# Altium PCB PCB1.PcbDoc
Units mil, origin at the board's own origin, x right, y up, seen from the top; angles counter-clockwise.
Board outline 3094 x 2704 mil, 2 copper layers (Top Layer, Bottom Layer); 41 components, 23 nets, 97 pads, 3 vias.
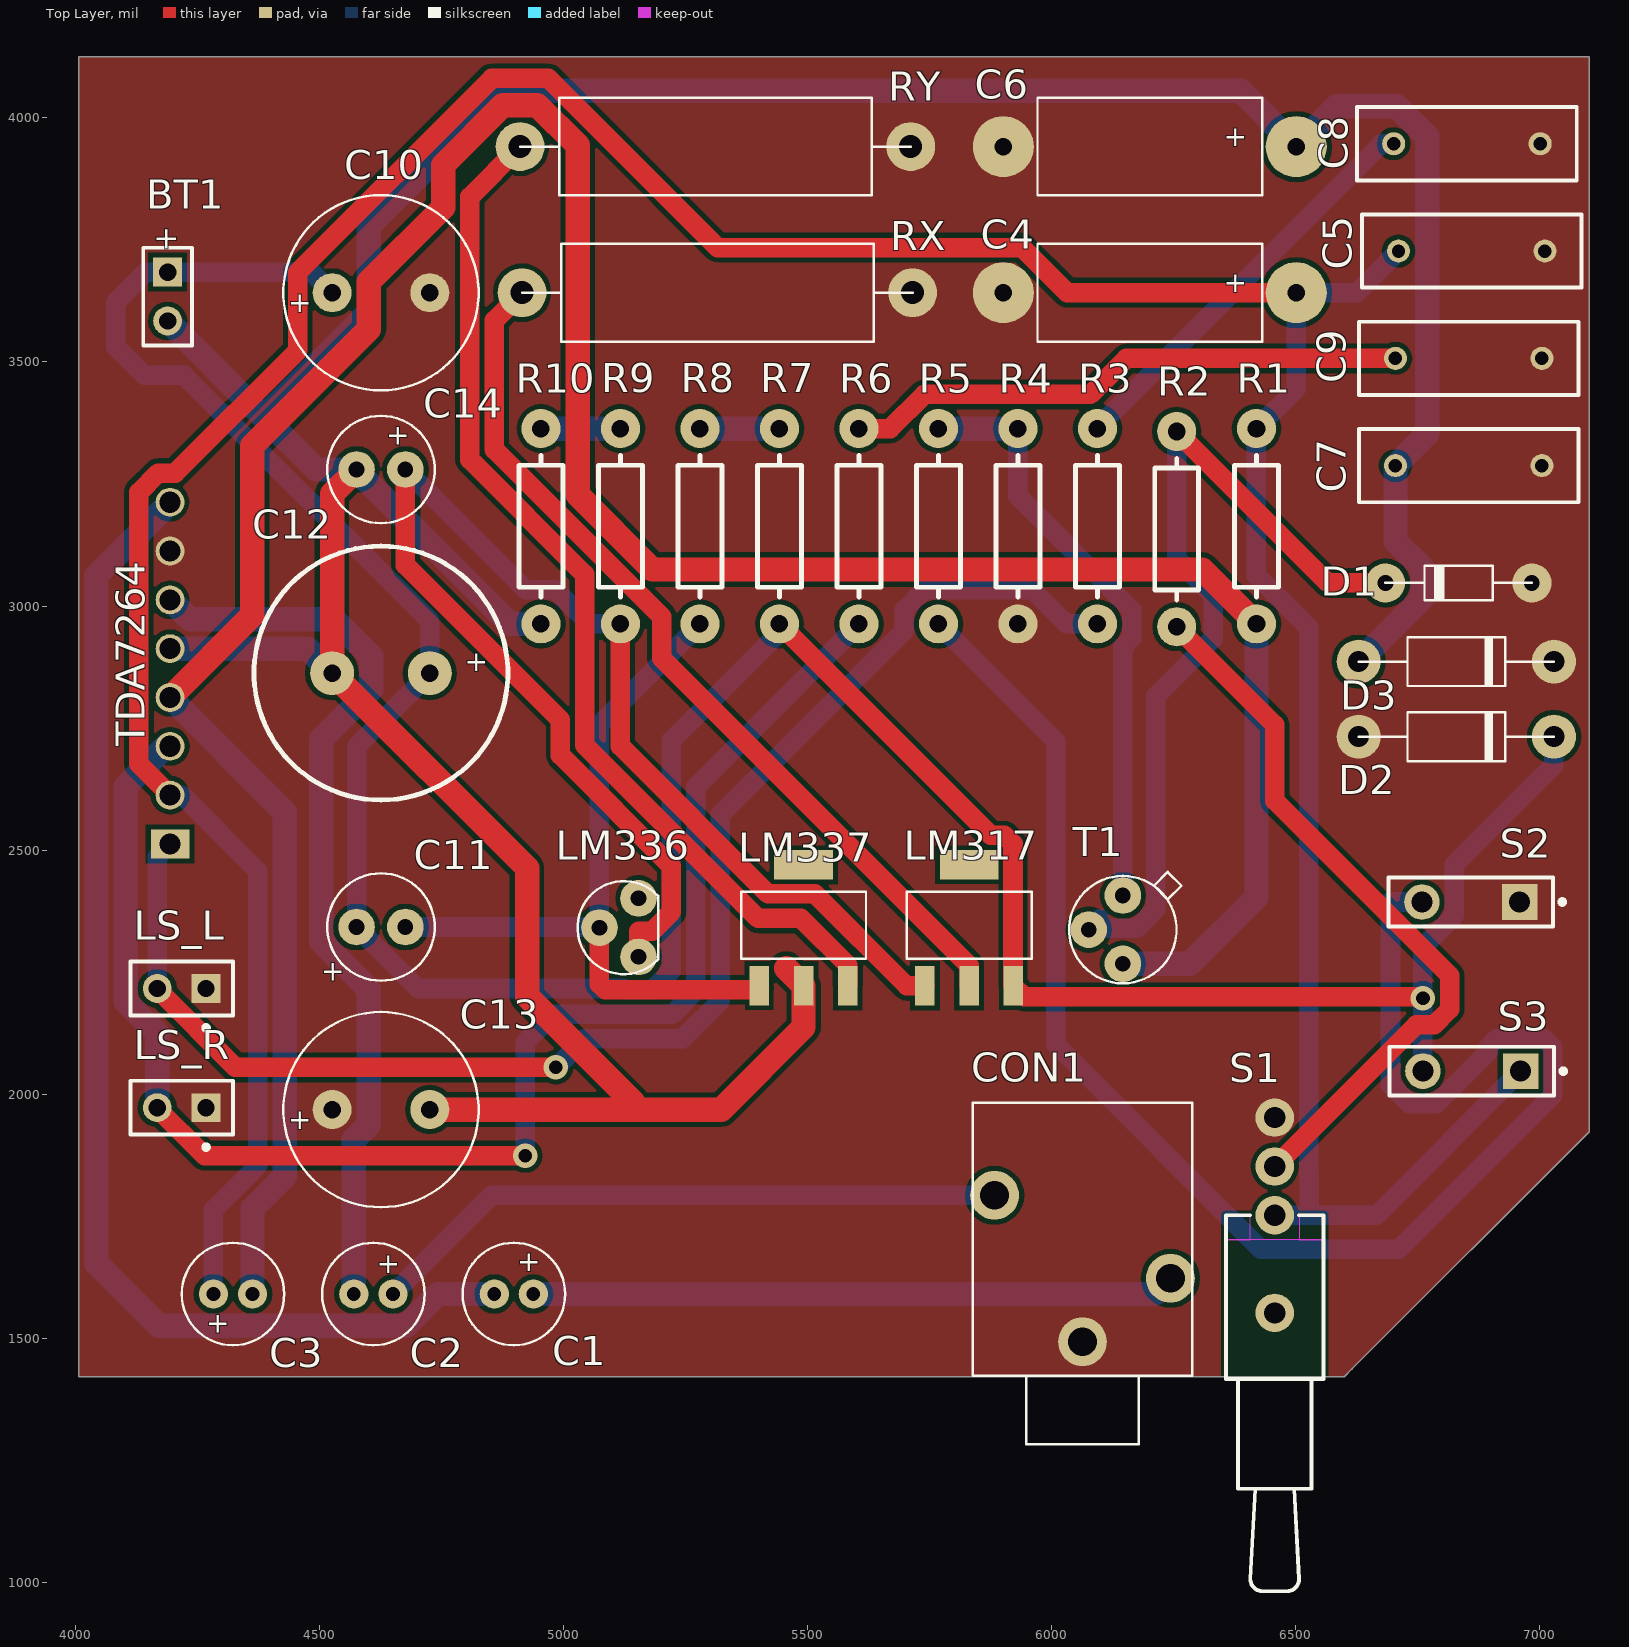
[diagram p0: Top Layer view]
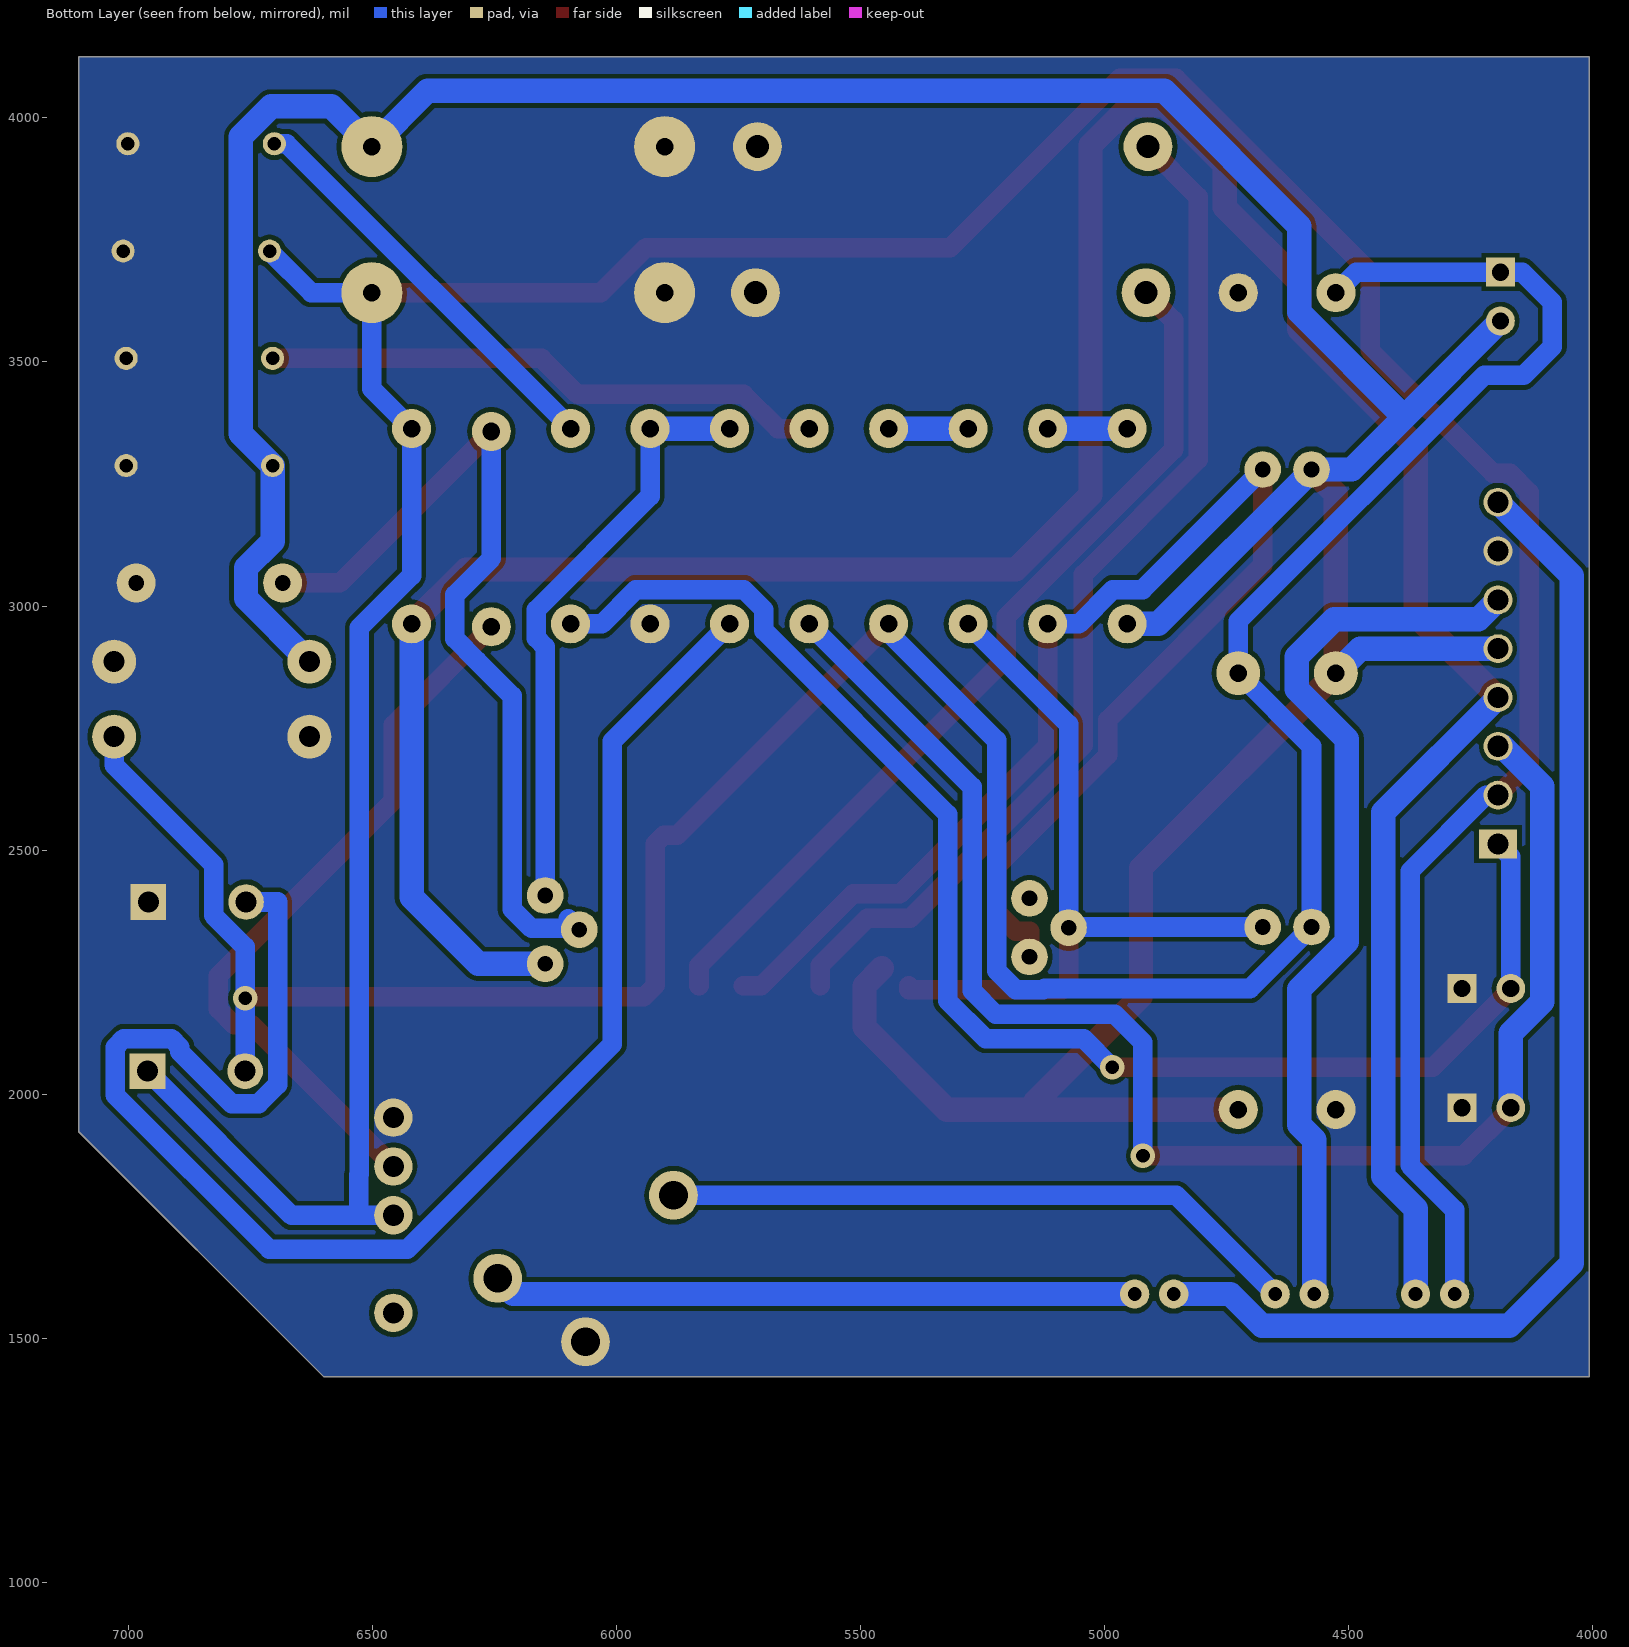
[diagram p1: Bottom Layer view, seen from below]

## Layer stack, top to bottom
Top Solder: solder mask 0.4, Solder Resist, Dk 3.5
Top Layer: signal copper 1.4
Dielectric1: dielectric 12.6, FR-4, Dk 4.8
Bottom Layer: signal copper 1.4
Bottom Solder: solder mask 0.4, Solder Resist, Dk 3.5

## Board outline
4007,4125 7101,4125 7101,1923 6615,1437 6599,1421 4007,1421

## Design rules (kind name [scope] priority, off if disabled: settings)
Clearance [All] p1: gap=10
PolygonConnect PolygonConnect_1 [All] p1: connectstyle=Direct reliefconductorwidth=10 reliefentries=4 polygonreliefangle="90 Angle" airgapwidth=10
PolygonConnect [All] p2: connectstyle=Relief reliefconductorwidth=10 reliefentries=4 polygonreliefangle="90 Angle" airgapwidth=10
RoomDefinition Sheet1 [InComponentClass('Sheet1')] p1: confinementstyle=ConfineOut formatcopy=TRUE lockcomponents=FALSE outline 7716.54,2649.61 7740.16,2649.61 8000,2389.76 7937.01,2326.77 7633.86,2326.77
RoutingVias [All] p1: holewidth=28 width=50 viastyle="Through Hole" minholewidth=28 minwidth=50 maxholewidth=28 maxwidth=50
SolderMaskExpansion [All] p1: expansion=4
UnpouredPolygon [All] p1: allowunpoured=FALSE
Width [All] p1: maxlimit=80 minlimit=40 preferedwidth=50
29 further rules are at their usual default settings.

## Components (designator, comment, footprint, x,y, rotation, side; value= is the part's Value field where it differs from the comment)
BT1 "Battery" BAT-2 4188.98,3633.86 r270 top
C1 "1uF" "cap 83 pol (D.21/.08/60/28)" 4898.17,1590.72 r180 top
C2 "1uF" "cap 83 pol (D.21/.08/60/28)" 4610.5,1590.72 r180 top
C3 "1uF" "cap 83 pol (D.21/.08/60/28)" 4322.83,1590.72 r0 top
C4 "Cap" "cap 48 pol (.46/.2/.6/125/36)" 6200.79,3641.73 r180 top
C5 "100nF" RAD-0.3 6860.24,3727.1 r180 top
C6 "Cap" "cap 48 pol (.46/.2/.6/125/36)" 6200.79,3940.94 r180 top
C7 "Cap" RAD-0.3 6854.02,3287.61 r180 top
C8 "Cap" RAD-0.3 6850.39,3946.85 r180 top
C9 "Cap" RAD-0.3 6854.02,3507.35 r180 top
C10 "CECR1000uF/25V" "cap 64 pol (D.4/.2/80/36)" 4625.98,3641.73 r0 top
C11 "CECR22uF/35V" "cap 62 pol (D.22/.1/75/32)" 4625.98,2342.52 r0 top
C12 "CECR470uF/63V" "cap 63 pol (D.52/.2/90/36)" 4625.98,2862.62 r180 top
C13 "CECR1000uF/25V" "cap 64 pol (D.4/.2/80/36)" 4625.98,1968.5 r0 top
C14 "CECR22uF/35V" "cap 62 pol (D.22/.1/75/32)" 4625.98,3279.53 r180 top
CON1 "CON JACKSOCK3.5/MJ-352W-0" "con jacksock 3.5mm (MJ-352W-0)" 6062.99,1692.91 r270 top
D1 "BZX79C5V1" DO-35 6783.46,3047.24 r180 top
D2 "1N4002" DO-41 6828.68,2732.28 r0 top
D3 "1N4002" DO-41 6828.68,2886.14 r0 top
LM317 "LM1117MPX-3.3" "smd SOT-223" 5830.59,2346.22 r0 top
LM336 "LM78L05ACZ" TO-92 5153.54,2341.22 r0 top
LM337 "LM1117MPX-3.3" "smd SOT-223" 5491.51,2346.22 r0 top
LS_L "Speaker" PIN2 4267.72,2216.54 r180 top
LS_R "Speaker" PIN2 4267.72,1972.44 r180 top
R1 "Res" "ws 0.6W H" 6419.29,3163.39 r90 top
R2 "Res" "ws 0.6W H" 6255.91,3157.48 r270 top
R3 "Res" "ws 0.6W H" 6093.59,3163.39 r90 top
R4 "Res" "ws 0.6W H" 5930.74,3163.39 r90 top
R5 "Res" "ws 0.6W H" 5767.89,3163.39 r90 top
R6 "Res" "ws 0.6W H" 5605.04,3163.39 r270 top
R7 "2K2" "ws 0.6W H" 5442.19,3163.39 r90 top
R8 "120R" "ws 0.6W H" 5279.34,3163.39 r90 top
R9 "2K2" "ws 0.6W H" 5116.49,3163.39 r90 top
R10 "120R" "ws 0.6W H" 4953.64,3163.39 r90 top
RX "1R1/2.5W" "ws 2.5W H" 5314.96,3641.73 r180 top
RY "1R1/2.5W" "ws 2.5W H" 5311.02,3940.94 r0 top
S1 "SW-SPDT" TL36WW15050 6456.69,1751.97 r270 top
S2 "SW-PB" SPST-2 6858.27,2393.7 r180 top
S3 "SW-SPST" SPST-2 6860.24,2047.24 r180 top
T1 "BC107" TO-18 6145.67,2337.08 r0 top
TDA7264 "TDA7264 stereo audio amplifier" MultiWatt8 4194,2512.62 r90 top

## Footprints (in the part's own frame and the unit in brackets; to place one, negate y for a bottom-side part, rotate by r counter-clockwise, add the part's x,y. Pads: shape width x height; smd on the part's side, far side on the other; paste and mask are expansions set on the pad)
BAT-2 [mm] "Battery; 2 Leads"
  rect 1.5x1.5 hole 0.9: 1(-1.27,0)
  round 1.5 hole 0.9: 2(1.27,0)
  silkscreen extent -2.54,-1.27 2.54,1.27
"cap 48 pol (.46/.2/.6/125/36)" [mil]
  round 125 / inner round 60 / far side round 125 hole 36 paste+0 mask+0: 1(-300,0) 2(300,0)
  silkscreen extent -230,-100 230,100
"cap 62 pol (D.22/.1/75/32)" [mil]
  round 75 / inner round 60 / far side round 75 hole 32 paste+0 mask+0: 1(-50,0) 2(50,0)
  silkscreen extent -110,-110 110,110
"cap 63 pol (D.52/.2/90/36)" [mil]
  round 90 / inner round 60 / far side round 90 hole 36 paste+0 mask+0: 1(-100,0) 2(100,0)
  silkscreen extent -260,-260 260,260
"cap 64 pol (D.4/.2/80/36)" [mil]
  round 80 / inner round 60 / far side round 80 hole 36 paste+0 mask+0: 1(-100,0) 2(100,0)
  silkscreen extent -200,-200 200,200
"cap 83 pol (D.21/.08/60/28)" [mil]
  round 60 hole 28 paste+0 mask+0: 1(-40,0) 2(40,0)
  silkscreen extent -105,-105 105,105
"con jacksock 3.5mm (MJ-352W-0)" [mil]
  round 100 / inner round 60 / far side round 100 hole 59 paste+0 mask+0: 1(200,0) 2(70,180) 3(-100,-180)
  silkscreen extent -290,-225 410,225
DO-35 [mil]
  round 80 / inner round 60 / far side round 80 hole 32 paste+0 mask+0: 1(-200,0) 2(100,0)
  silkscreen extent -200,-35 100,35
DO-41 [mil]
  round 90 / inner round 60 / far side round 90 hole 43 paste+0 mask+0: 1(-200,0) 2(200,0)
  silkscreen extent -200,-50 200,50
MultiWatt8 [mm]
  rect 1.5x2 hole 1.1: 1(0,0)
  round 1.5 hole 1.1: 2(2.54,0) 3(5.08,0) 4(7.62,0) 5(10.16,0) 6(12.7,0) 7(15.24,0) 8(17.78,0)
PIN2 [mm] "Photosensitive Diode; 2 Leads"
  rect 1.5x1.5 hole 0.9: 1(0,0)
  round 1.5 hole 0.9: 2(2.54,0)
  silkscreen extent -1.4,-1.4 3.94,2.17
RAD-0.3 [mm] "Radial Cap, Thru-Hole; 2 Leads; 0.3 in Pin Spacing"
  round 1.2 hole 0.7: 1(-3.81,0) 2(3.81,0)
  silkscreen extent -5.71,-1.91 5.71,1.91
"smd SOT-223" [mil]
  rect 40x80 smd paste+0 mask+0: 1(-90.55,-124.02) 2(0,-124.02) 3(90.55,-124.02)
  rect 120x60 smd paste+0 mask+0: 4(0,124.02)
  silkscreen extent -128,-69 128,69
SPST-2 [mm] "Switch; 2 Leads"
  rect 1.85x1.85 hole 1.1: 1(-2.54,0)
  round 1.85 hole 1.1: 2(2.54,0)
  silkscreen extent -4.89,-1.27 4.28,1.27
TL36WW15050 [mm] "Switch; 4 Leads"
  round 2 hole 1.1: 1(0,0) 2(-2.54,0) 3(-5.08,0) M(5.08,0)
  Top Layer keep-out region: 0,-1.27 0,-2.54 1.27,-2.54 1.27,-1.27
  Top Layer keep-out region: 0,2.54 0,1.27 1.27,1.27 1.27,2.54
  Top Layer keep-out region: 1.27,2.54 1.27,-2.54 8.509,-2.54 8.509,2.54
  silkscreen extent 0,-2.54 19.56,2.54
TO-18 [mil]
  round 75 / inner round 60 / far side round 75 hole 32 paste+0 mask+0: 1(0,70) 2(-70,0) 3(0,-70)
  silkscreen extent -110,-110 120,118
TO-92 [mil]
  round 75 / inner round 60 / far side round 75 hole 32 paste+0 mask+0: 1(0,60) 2(-80,0) 3(0,-60)
  silkscreen extent -125,-95 40,95
"ws 0.6W H" [mil]
  round 80 hole 36: 1(-200,0) 2(200,0)
  silkscreen extent -145,-45 145,45
"ws 2.5W H" [mil]
  round 100 / inner round 60 / far side round 100 hole 47 paste+0 mask+0: 1(-400,0) 2(400,0)
  silkscreen extent -400,-100 400,100

## Part data
BT1: "Multicell Battery"
C1 C2 C3: library part CECR22uF/16V, "elektrolytische condensator radiaal 22uF/16V"
C4 C6: library part CECA0.47uF/63V, "elektrolytische condensator axiaal 0.47uF/63V"
C5: library part Cap, "Capacitor"
C7 C8 C9: "Capacitor"
C10 C13: "elektrolytische condensator radiaal 1000uF/25V"
C11 C14: "elektrolytische condensator radiaal 22uF/35V"
C12: "elektrolytische condensator radiaal 470uF/63V"
CON1: "audio socket 3.5mm stereo, MJ-352W-0"
D1: "zenerdiode 400mW/5V1"
D2 D3: "gelijkrichterdiode 100V/1A"
LM317 LM337: "low dropout linear regulator, 3.3V 800mA, SOT-223"
LM336: "spanningsregelaar, +5V, TO-92"
LS_L LS_R: "Loudspeaker"
R1 R2 R3 R4 R5 R6: library part 0R2, "weerstand 0R2 0.6W"
R7 R9: "weerstand 2K2 0.6W"
R8 R10: "weerstand 120R 0.6W"
RX RY: "weerstand 1R1 2.5W"
S1: "SPDT Subminiature Toggle Switch, Right Angle Mounting, Vertical Actuation"
S2: "Switch"
S3: "Single-Pole, Single-Throw Switch"
T1: "NPN transistor"
TDA7264: "25 W + 25 W stereo amplifier with mute and standby"

## Via types
v1: diameter 50, hole 28, Top Layer to Bottom Layer, 3 vias

## Nets (pads, with @x,y where several pads share a name; then routed paths per layer and width w, separated by ;. In a path a pad name is that pad's centre, name@x,y a point inside that pad or via, vN(x,y) a via of type N, cw(c..) or ccw(c..) an arc to the next point about the centre after c; other vN are vias at no path point)
+VS: BT1.1 C10.1 C11.1 C12.1 D2.2 LM317.3 R7.1 S3.2 | length 6255.3
  Top Layer w40: R7.1 5875.34,2530.24 5903.02,2530.24 5920.59,2512.66 LM317.3@5920.59,2222.76 ; LM317.3 5943.77,2199.58 v1@6757.51,2199.58
  Bottom Layer w40: C10.1 4483.86,3683.86 BT1.1 4144.49,3683.86 4082.68,3622.05 4082.68,3531.5 4141.73,3472.44 4222.61,3472.44 4725.98,2969.07 C12.1 4575.98,2712.62 C11.1 4701.97,2216.54 5122.77,2216.54 5125.58,2213.72 5181.5,2213.72 5221.04,2253.26 5221.04,2724.98 5442.19,2946.13 R7.1 ; S3.2 v1(6760.24,2196.85) 6760.24,2301.74 6824.69,2366.19 6824.69,2470.35 7028.68,2674.35 D2.2
-VS: BT1.2 C6.1 C7.2 C12.2 C13.2 C14.2 D3.1 LM337.2 R10.1 TDA7264.5 | length 7963.6
  Top Layer w50: C14.2 4525.98,3229.53 C12.2 4925.2,2463.41 4925.2,2200.79 5141.73,1984.25 ; C13.2 5322.83,1968.5 5491.51,2137.18 LM337.2 5455.96,2257.76
  Bottom Layer w50: BT1.2 4385.83,3387.01 ; TDA7264.5 4475.98,2912.62 C12.2 ; C14.2@4575.98,3277 4889.6,2963.39 R10.1 ; C14.2 4493.31,3279.53 4385.83,3387.01 ; D3.1 6758.46,3015.93 6758.46,3078.31 6704.02,3132.76 C7.2 6768.86,3352.45 6768.86,3961.29 6706.53,4023.62 6583.46,4023.62 C6.1 6386.61,4055.12 4877.95,4055.12 4600.98,3778.15 4600.98,3602.17 4385.83,3387.01
GND: C4.2 C5.1 C6.2 C7.1 C8.1 C9.1 C10.2 C13.1 CON1.1 D1.1 D2.1 D3.2 LS_L.1 LS_R.1 R4.1 RX.1 RY.2 S1.3 S2.1 TDA7264.7
NetC1_1: C1.1 CON1.2 | length 1318.2
  Bottom Layer w50: C1.1 6210.8,1590.72 CON1.2
NetC1_2: C1.2 TDA7264.8 | length 2516.3
  Bottom Layer w50: TDA7264.8 4043.19,3061.81 4043.19,1653.66 4171.13,1525.72 4677.43,1525.72 4742.43,1590.72 C1.2
NetC2_1: C2.1 CON1.3 | length 1316.2
  Bottom Layer w40: C2.1 4852.69,1792.91 CON1.3
NetC2_2: C2.2 TDA7264.6 | length 1860.9
  Bottom Layer w50: TDA7264.6 4234,2972.62 4529.12,2972.62 4605.98,2895.76 4605.98,2829.48 4503.48,2726.98 4503.48,2312.49 4600.98,2214.99 4600.98,1937.44 4570.5,1906.96 C2.2
NetC3_1: C3.1 C4.1 C5.2 R1.2 S1.1 S3.1 TDA7264.2 | length 7607.8
  Top Layer w40: TDA7264.2 4129.92,2676.7 4129.92,3232.72 4169.34,3272.15 4204.32,3272.15 4455.98,3523.81 4455.98,3683.9 4853.03,4080.94 4969.01,4080.94 5315.73,3734.23 5939.1,3734.23 6031.6,3641.73 C4.1
  Bottom Layer w40: TDA7264.2@4218.09,2612.62 4374.02,2456.69 4374.02,1854.33 4282.83,1763.15 C3.1 ; S1.1 6527.56,1751.97 ; C5.2 6624.87,3641.73 C4.1 6500.79,3444.88 R1.2 6419.29,3062.38 6526.06,2955.61 6526.06,1836.14 6527.56,1834.65 6527.56,1751.97 ; S3.1 6664.96,1751.97 6527.56,1751.97
NetC3_2: C3.2 R1.1 T1.3 TDA7264.4 | length 6135.1
  Top Layer w50: TDA7264.4 4362.2,2980.82 4362.2,3327.95 4600.98,3566.73 4600.98,3663.98 4753.27,3816.26 4753.27,3903.4 4875.82,4025.94 4946.23,4025.94 5028.64,3943.53 5028.64,3228.01 5181.85,3074.8 6307.87,3074.8 R1.1
  Bottom Layer w50: TDA7264.4 4429.02,2577.6 4429.02,1831.55 4362.83,1765.37 C3.2 ; T1.3 6282.83,2267.08 6419.29,2403.54 R1.1
NetC8_2: C8.2 R3.2 | length 849.6
  Bottom Layer w40: R3.2 6093.59,3365.35 6675.09,3946.85 C8.2
NetC9_2: C9.2 R6.1 | length 1158.6
  Top Layer w40: R6.1 5668.9,3363.39 5738.9,3433.39 6079.06,3433.39 6153.02,3507.35 C9.2
NetC11_2: C11.2 LM336.2 LM337.1 R8.1 | length 1560.1
  Top Layer w40: LM336.2 5073.54,2225.67 5085.49,2213.72 5400.96,2213.72 LM337.1
  Bottom Layer w40: C11.2 LM336.2@5072.24,2342.52 ; LM336.2 5073.54,2757.59 R8.1
NetC14_1: C14.1 LM317.1 LM336.3 R9.1 | length 2917.2
  Top Layer w40: C14.1 4675.98,3083.86 4993.31,2766.54 4993.31,2694.59 5221.04,2466.85 5221.04,2373.26 5181.5,2333.72 5153.54,2333.72 LM336.3 ; R9.1 5116.49,2712.83 5419.08,2410.24 5514.96,2410.24 5702.99,2222.2 LM317.1
  Bottom Layer w40: C14.1 4922.13,3033.39 4982.64,3033.39 5052.64,2963.39 R9.1
NetD1_2: D1.2 R2.1 T1.2 | length 1797
  Top Layer w40: R2.1 6566.14,3047.24 D1.2
  Bottom Layer w40: T1.2 6097.94,2359.35 6097.94,2339.58 6173.63,2339.58 6213.17,2379.12 6213.17,2815.75 6284.9,2887.48 6330.71,2933.29 6330.71,3022.68 6255.91,3097.48 R2.1
NetLM317_2: LM317.2 RX.2 | length 1845.8
  Top Layer w40: RX.2 4858.27,3585.04 4858.27,3320.6 5200.79,2978.09 5200.79,2893.39 5830.59,2263.58 LM317.2
NetLM337_3: LM337.3 RY.1 | length 2133.3
  Top Layer w40: RY.1 4808.27,3838.19 4808.27,3299.89 5043.31,3064.85 5043.31,2715.3 5398.37,2360.24 5486.22,2360.24 5582.06,2264.4 LM337.3
NetLS_L_2: LS_L.2 R3.1 TDA7264.1 | length 2981.8
  Top Layer w40: LS_L.2@4167.72,2215.05 4327.65,2055.12 v1(4984.25,2055.12)
  Bottom Layer w40: LS_L.2 4167.72,2486.33 TDA7264.1 ; v1(4984.25,2055.12) 5042.85,2113.72 5243.49,2113.72 5321.04,2191.28 5321.04,2573.01 5697.89,2949.86 5697.89,2992.38 5738.9,3033.39 5959.74,3033.39 6029.74,2963.39 R3.1
NetLS_R_2: LS_R.2 R6.2 TDA7264.3 | length 3110.1
  Top Layer w40: LS_R.2@4167.72,1970.96 4264.66,1874.02 v1(4921.26,1874.02)
  Bottom Layer w40: v1(4921.26,1874.02) 4921.26,2106.3 4978.68,2163.72 5222.78,2163.72 5271.04,2211.99 5271.04,2629.39 R6.2
  Bottom Layer w50: LS_R.2 4167.72,2125.28 4103.19,2189.81 4103.19,2630.75 TDA7264.3@4185.06,2712.62
NetR2_2: R2.2 S1.2 | length 1507.1
  Top Layer w40: R2.2 6456.69,2756.69 6456.69,2601.35 6815.24,2242.8 6815.24,2174.07 6783.02,2141.85 6746.57,2141.85 S1.2
NetR4_2: R4.2 R5.2 T1.1 | length 1223.5
  Bottom Layer w40: R4.2 5930.74,3224.41 5931.56,3224.41 6163.59,2992.38 6163.59,2934.39 6145.67,2916.47 T1.1
  Bottom Layer w50: R5.2 R4.2
NetR5_1: R5.1 S2.2 | length 3236.4
  Bottom Layer w40: R5.1 6008.17,2723.11 6008.17,2102.39 6427.96,1682.6 6710.85,1682.6 7026.65,1998.4 7026.65,2096.09 7009.08,2113.66 6911.39,2113.66 6893.82,2096.09 6893.82,2086.9 6787.75,1980.83 6732.73,1980.83 6693.82,2019.73 6693.82,2393.7 S2.2
NetR7_2: R7.2 R8.2 | length 162.8
  Bottom Layer w50: R8.2 R7.2
NetR9_2: R9.2 R10.2 | length 162.8
  Bottom Layer w50: R10.2 R9.2
pads on no net: LM317.4 LM336.1 LM337.4 S1.M

## Polygon pours and split planes (outlines as drawn)
GND on Top Layer "Top Layer-No Net" (solid, pour order 4): 4007,4125 7101,4125 7101,1923 6607,1429 6599,1421 4007,1421
GND on Bottom Layer "Bottom layer -gnd" (solid, pour order 8): 4007,4125 7101,4125 7101,1923 6599,1421 4007,1421

## Text inside footprints (layer, text, board x,y; h text height)
BT1: Top Overlay "+" at 4166.26,3778.35 h45.28 r270
C1: Top Overlay "+" at 4952.76,1673.23 h42 r180
C2: Top Overlay "+" at 4665.35,1669.29 h42 r180
C3: Top Overlay "+" at 4267.72,1511.81 h42
C4: Top Overlay "+" at 6400.79,3678.73 h42 r180
C6: Top Overlay "+" at 6400.79,3977.94 h42 r180
C10: Top Overlay "+" at 4435.98,3601.73 h42
C11: Top Overlay "+" at 4503.94,2232.28 h42
C12: Top Overlay "+" at 4845.98,2902.62 h42 r180
C13: Top Overlay "+" at 4435.98,1928.5 h42
C14: Top Overlay "+" at 4685.04,3366.14 h42 r180